# Altium PCB 256ch Headstage PCB_TY.PcbDoc (part 2 of 2)
Units mm, origin at the board's own origin, x right, y up, seen from the top; angles counter-clockwise.
Board outline 24.93 x 25 mm, 4 copper layers (Top Layer, Signal Layer 1, Signal Layer 2, Bottom Layer), stack 0.778 mm thick; 20 components, 288 nets, 788 pads, 303 vias.
Unrouted connection lines stored in the file: 4.
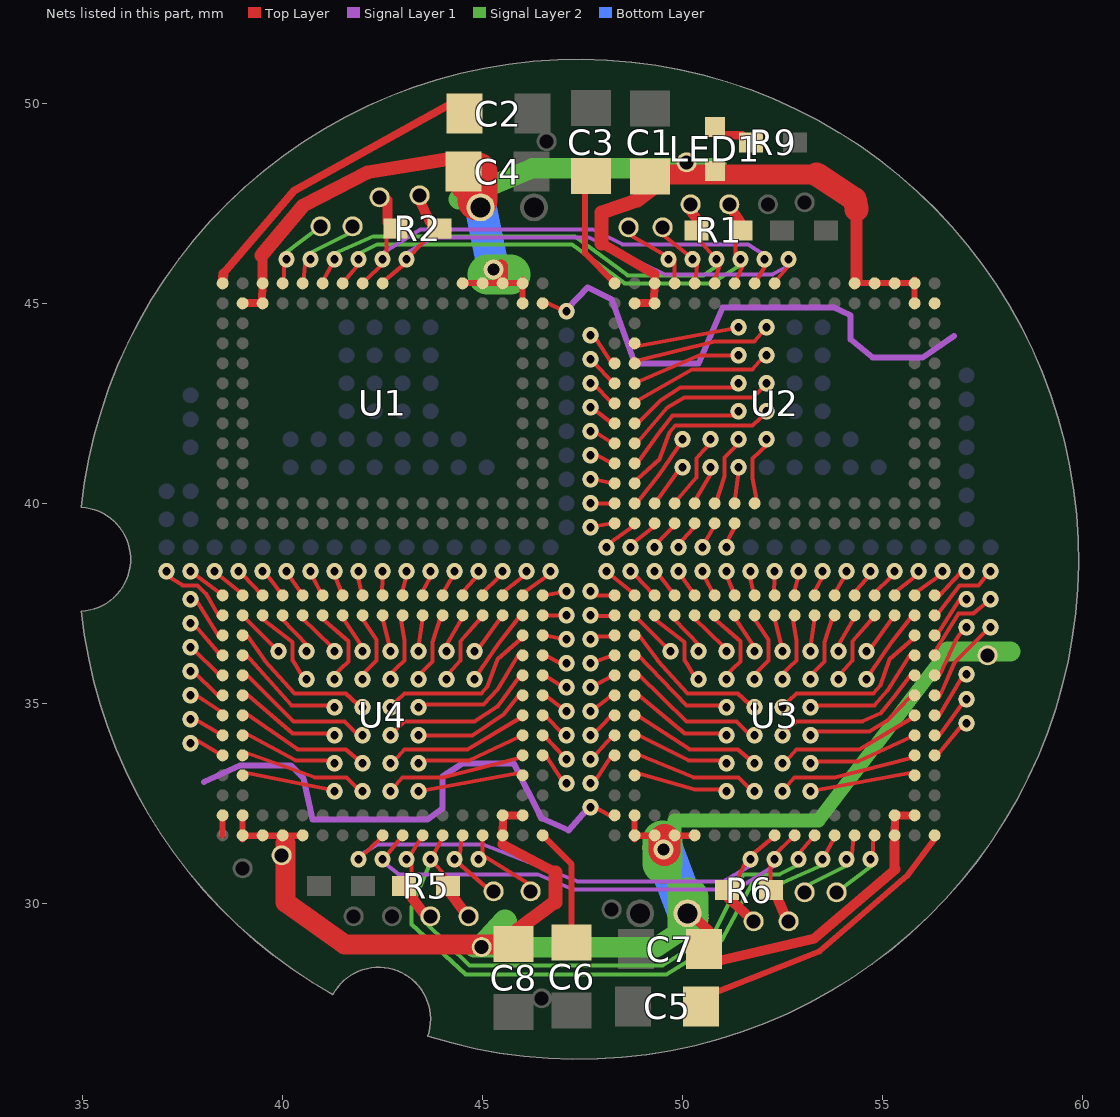
[diagram p4: the nets of this part, all layers, seen from the top]

## Via types
v1: diameter 0.406, hole 0.203, Top Layer to Bottom Layer, 291 vias
v2: diameter 0.5, hole 0.3, Top Layer to Bottom Layer, 12 vias

## Nets (pads, with @x,y where several pads share a name; then routed paths per layer and width w, separated by ;. In a path a pad name is that pad's centre, name@x,y a point inside that pad or via, vN(x,y) a via of type N, cw(c..) or ccw(c..) an arc to the next point about the centre after c; other vN are vias at no path point) (continued)
IN98: pad.0@52.1,41.6 U2.B10 | length 1.6
  Top Layer w0.102: U2.B10@51.854,40.041 51.75,40.625 51.75,41.125 v1@52.125,41.475
  other v1: 52.1,41.6
IN99: pad.0@51.1,38.9 U2.A11 | length 0.6
  Top Layer w0.102: v1@51.075,38.975 U2.A11@51.334,39.468
  other v1: 51.1,38.9
IN100: pad.0@51.4,40.9 U2.B11 | length 0.8
  Top Layer w0.102: U2.B11@51.295,40.016 v1@51.4,40.775
  other v1: 51.4,40.9
IN101: pad.0@50.5,38.9 U2.A12 | length 0.6
  Top Layer w0.102: v1@50.525,38.975 U2.A12@50.826,39.493
  other v1: 50.5,38.9
IN102: pad.0@51.4,41.6 U2.B12 | length 1.7
  Top Layer w0.102: U2.B12@50.838,40.016 51.05,40.675 51.05,41.15 v1@51.4,41.5
  other v1: 51.4,41.6
IN103: pad.0@49.9,38.9 U2.A13 | length 0.7
  Top Layer w0.102: v1@49.9,38.975 U2.A13@50.369,39.493
  other v1: 49.9,38.9
IN104: pad.0@50.7,40.9 U2.B13 | length 0.9
  Top Layer w0.102: U2.B13@50.28,40.015 v1@50.725,40.775
  other v1: 50.7,40.9
IN105: pad.0@49.3,38.9 U2.A14 | length 0.6
  Top Layer w0.102: v1@49.375,39.025 U2.A14@49.813,39.46
  other v1: 49.3,38.9
IN106: pad.0@50.7,41.6 U2.B14 | length 1.8
  Top Layer w0.102: U2.B14@49.822,40.041 50.35,40.65 50.35,41.125 v1@50.728,41.548
  other v1: 50.7,41.6
IN107: pad.0@48.7,38.9 U2.A15 | length 0.7
  Top Layer w0.102: v1@48.75,39 U2.A15@49.325,39.45
  other v1: 48.7,38.9
IN108: pad.0@50,40.9 U2.B15 | length 1.1
  Top Layer w0.102: U2.B15@49.325,40.025 v1@49.95,40.9
  other v1: 50,40.9
IN109: pad.0@48.1,38.9 U2.A16 | length 0.7
  Top Layer w0.102: v1@48.2,39.025 U2.A16@48.8,39.45
  other v1: 48.1,38.9
IN110: pad.0@50,41.6 U2.B16 | length 1.9
  Top Layer w0.102: U2.B16@48.881,40.04 49.4,40.7 v1@50,41.575
  other v1: 50,41.6
IN111: pad.0@47.7,39.4 U2.A17 | length 0.5
  Top Layer w0.102: v1@47.66,39.39 U2.A17@48.198,39.498
  other v1: 47.7,39.4
IN112: pad.0@47.7,40 U2.B17 | length 0.5
  Top Layer w0.102: v1@47.8,40 U2.B17@48.3,40
  other v1: 47.7,40
IN113: pad.0@52.1,42.3 U2.C16 | length 4.2
  Top Layer w0.102: U2.C16@48.856,40.598 49.425,41.1 49.675,41.775 49.825,41.95 51.75,41.95 v1@52.15,42.325
  other v1: 52.1,42.3
IN114: pad.0@47.7,40.6 U2.C17 | length 0.5
  Top Layer w0.102: v1@47.81,40.59 U2.C17@48.273,40.498
  other v1: 47.7,40.6
IN115: pad.0@51.4,42.3 U2.D16 | length 3
  Top Layer w0.102: U2.D16@48.907,41.055 49.4,41.75 49.75,42.2 v1@51.375,42.2
  other v1: 51.4,42.3
IN116: pad.0@47.7,41.2 U2.D17 | length 0.6
  Top Layer w0.102: v1@47.785,41.24 U2.D17@48.323,40.956
  other v1: 47.7,41.2
IN117: pad.0@52.1,43 U2.E16 | length 3.8
  Top Layer w0.102: U2.E16@48.9,41.55 49.625,42.4 50.05,42.65 51.75,42.65 v1@52.125,43
  other v1: 52.1,43
IN118: pad.0@47.7,41.8 U2.E17 | length 0.6
  Top Layer w0.102: v1@47.76,41.815 U2.E17@48.273,41.489
  other v1: 47.7,41.8
IN119: pad.0@51.4,43 U2.F16 | length 2.9
  Top Layer w0.102: U2.F16@48.9,42.025 49.45,42.575 49.95,42.9 v1@51.475,42.9
  other v1: 51.4,43
IN120: pad.0@47.7,42.4 U2.F17 | length 0.6
  Top Layer w0.102: v1@47.76,42.365 U2.F17@48.273,41.973
  other v1: 47.7,42.4
IN121: pad.0@52.1,43.7 U2.G16 | length 3.6
  Top Layer w0.102: U2.G16@48.882,42.58 50.25,43.35 51.75,43.35 v1@52.075,43.725
  other v1: 52.1,43.7
IN122: pad.0@47.7,43 U2.G17 | length 0.6
  Top Layer w0.102: v1@47.785,42.965 U2.G17@48.223,42.523
  other v1: 47.7,43
IN123: pad.0@51.4,43.7 U2.H16 | length 2.6
  Top Layer w0.102: U2.H16@48.882,43.038 50.425,43.7 v1@51.375,43.7
  other v1: 51.4,43.7
IN124: pad.0@47.7,43.6 U2.H17 | length 0.7
  Top Layer w0.102: v1@47.785,43.515 U2.H17@48.248,43.023
  other v1: 47.7,43.6
IN125: pad.0@52.1,44.4 U2.J16 | length 3.5
  Top Layer w0.102: U2.J16@48.882,43.57 50.8,44.05 51.8,44.05 v1@52.125,44.425
  other v1: 52.1,44.4
IN126: pad.0@47.7,44.2 U2.J17 | length 0.8
  Top Layer w0.102: v1@47.81,44.14 U2.J17@48.223,43.498
  other v1: 47.7,44.2
IN127: pad.0@51.4,44.4 U2.K16 | length 2.5
  Top Layer w0.102: U2.K16@48.825,43.925 v1@51.275,44.375
  other v1: 51.4,44.4
IN128: pad.0@51.1,32.8 U3.K2 | length 2.1
  Top Layer w0.102: U3.K2@48.9,33.25 50.3,32.85 v1@50.95,32.85
  other v1: 51.1,32.8
IN129: pad.0@47.7,33 U3.J1 | length 0.8
  Top Layer w0.102: v1@47.775,33 U3.J1@48.226,33.705
  other v1: 47.7,33
IN130: pad.0@51.8,32.8 U3.J2 | length 3
  Top Layer w0.102: U3.J2@48.875,33.725 50.275,33.15 51.4,33.15 v1@51.675,32.875
  other v1: 51.8,32.8
IN131: pad.0@47.7,33.6 U3.H1 | length 0.8
  Top Layer w0.102: v1@47.7,33.575 U3.H1@48.226,34.162
  other v1: 47.7,33.6
IN132: pad.0@51.1,33.5 U3.H2 | length 2.2
  Top Layer w0.102: U3.H2@48.9,34.2 50.15,33.575 v1@50.975,33.575
  other v1: 51.1,33.5
IN133: pad.0@47.7,34.2 U3.G1 | length 0.7
  Top Layer w0.102: v1@47.75,34.2 U3.G1@48.201,34.67
  other v1: 47.7,34.2
IN134: pad.0@51.8,33.5 U3.G2 | length 3.1
  Top Layer w0.102: U3.G2@48.9,34.675 50.175,33.85 51.375,33.85 v1@51.675,33.6
  other v1: 51.8,33.5
IN135: pad.0@47.7,34.8 U3.F1 | length 0.5
  Top Layer w0.102: v1@47.77,34.847 U3.F1@48.201,35.178
  other v1: 47.7,34.8
IN136: pad.0@51.1,34.2 U3.F2 | length 2.5
  Top Layer w0.102: U3.F2@48.902,35.201 50.05,34.25 v1@51.025,34.25
  other v1: 51.1,34.2
IN137: pad.0@47.7,35.4 U3.E1 | length 0.5
  Top Layer w0.102: v1@47.769,35.433 U3.E1@48.251,35.685
  other v1: 47.7,35.4
IN138: pad.0@51.8,34.2 U3.E2 | length 3.4
  Top Layer w0.102: U3.E2@48.9,35.725 50.1,34.55 51.35,34.55 v1@51.65,34.25
  other v1: 51.8,34.2
IN139: pad.0@47.7,36 U3.D1 | length 0.5
  Top Layer w0.102: v1@47.745,36.016 U3.D1@48.251,36.194
  other v1: 47.7,36
IN140: pad.0@51.1,34.9 U3.D2 | length 2.6
  Top Layer w0.102: U3.D2@48.877,36.226 50.1,34.95 v1@50.975,34.95
  other v1: 51.1,34.9
IN141: pad.0@47.7,36.6 U3.C1 | length 0.5
  Top Layer w0.102: v1@47.744,36.674 U3.C1@48.251,36.677
  other v1: 47.7,36.6
IN142: pad.0@51.8,34.9 U3.C2 | length 3.5
  Top Layer w0.102: U3.C2@48.925,36.675 49.375,36.075 50.125,35.25 51.375,35.25 v1@51.675,34.975
  other v1: 51.8,34.9
IN143: pad.0@47.7,37.2 U3.B1 | length 0.5
  Top Layer w0.102: v1@47.719,37.183 U3.B1@48.225,37.185
  other v1: 47.7,37.2
IN144: pad.0@47.7,37.8 U3.A1 | length 0.5
  Top Layer w0.102: v1@47.8,37.7 U3.A1@48.3,37.7
  other v1: 47.7,37.8
IN145: pad.0@49.7,36.3 U3.B2 | length 1
  Top Layer w0.102: U3.B2@48.877,37.126 v1@49.6,36.4
  other v1: 49.7,36.3
IN146: pad.0@48.1,38.3 U3.A2 | length 0.8
  Top Layer w0.102: v1@48.175,38.225 U3.A2@48.8,37.725
  other v1: 48.1,38.3
IN147: pad.0@50.4,35.6 U3.B3 | length 1.8
  Top Layer w0.102: U3.B3@49.3,37.1 50.05,36.525 50.05,36.075 v1@50.275,35.7
  other v1: 50.4,35.6
IN148: pad.0@48.7,38.3 U3.A3 | length 0.7
  Top Layer w0.102: v1@48.825,38.2 U3.A3@49.275,37.725
  other v1: 48.7,38.3
IN149: pad.0@50.4,36.3 U3.B4 | length 1
  Top Layer w0.102: U3.B4@49.777,37.126 v1@50.45,36.425
  other v1: 50.4,36.3
IN150: pad.0@49.3,38.3 U3.A4 | length 0.8
  Top Layer w0.102: v1@49.3,38.35 U3.A4@49.775,37.725
  other v1: 49.3,38.3
IN151: pad.0@51.1,36.3 U3.B5 | length 1
  Top Layer w0.102: U3.B5@50.3,37.125 v1@51.025,36.425
  other v1: 51.1,36.3
IN152: pad.0@49.9,38.3 U3.A5 | length 0.6
  Top Layer w0.102: v1@49.95,38.2 U3.A5@50.3,37.7
  other v1: 49.9,38.3
IN153: pad.0@51.1,35.6 U3.B6 | length 1.9
  Top Layer w0.102: U3.B6@50.777,37.126 51.45,36.55 51.45,36.05 v1@51.05,35.675
  other v1: 51.1,35.6
IN154: pad.0@50.5,38.3 U3.A6 | length 0.6
  Top Layer w0.102: v1@50.525,38.2 U3.A6@50.791,37.693
  other v1: 50.5,38.3
IN155: pad.0@51.8,36.3 U3.B7 | length 0.9
  Top Layer w0.102: U3.B7@51.298,37.134 v1@51.775,36.425
  other v1: 51.8,36.3
IN156: pad.0@51.1,38.3 U3.A7 | length 0.5
  Top Layer w0.102: v1@51.1,38.2 U3.A7@51.299,37.718
  other v1: 51.1,38.3
IN157: pad.0@51.8,35.6 U3.B8 | length 1.7
  Top Layer w0.102: U3.B8@51.781,37.135 52.15,36.575 52.15,36.075 v1@51.8,35.725
  other v1: 51.8,35.6
IN158: pad.0@51.7,38.3 U3.A8 | length 0.5
  Top Layer w0.102: v1@51.675,38.2 U3.A8@51.782,37.718
  other v1: 51.7,38.3
IN159: pad.0@52.5,36.3 U3.B9 | length 0.8
  Top Layer w0.102: U3.B9@52.288,37.185 v1@52.475,36.425
  other v1: 52.5,36.3
IN160: pad.0@52.3,38.3 U3.A9 | length 0.6
  Top Layer w0.102: U3.A9@52.289,37.668 v1@52.3,38.225
  other v1: 52.3,38.3
IN161: pad.0@52.9,38.3 U3.A10 | length 0.6
  Top Layer w0.102: U3.A10@52.758,37.683 v1@52.925,38.275
  other v1: 52.9,38.3
IN162: pad.0@52.5,35.6 U3.B10 | length 1.6
  Top Layer w0.102: v1@52.475,35.725 52.85,36.075 52.85,36.575 U3.B10@52.746,37.159
  other v1: 52.5,35.6
IN163: pad.0@53.5,38.3 U3.A11 | length 0.6
  Top Layer w0.102: U3.A11@53.266,37.732 v1@53.525,38.225
  other v1: 53.5,38.3
IN164: pad.0@53.2,36.3 U3.B11 | length 0.8
  Top Layer w0.102: v1@53.2,36.425 U3.B11@53.305,37.184
  other v1: 53.2,36.3
IN165: pad.0@54.1,38.3 U3.A12 | length 0.6
  Top Layer w0.102: U3.A12@53.774,37.707 v1@54.075,38.225
  other v1: 54.1,38.3
IN166: pad.0@53.2,35.6 U3.B12 | length 1.7
  Top Layer w0.102: v1@53.2,35.7 53.55,36.05 53.55,36.525 U3.B12@53.762,37.184
  other v1: 53.2,35.6
IN167: pad.0@54.7,38.3 U3.A13 | length 0.7
  Top Layer w0.102: U3.A13@54.231,37.707 v1@54.7,38.225
  other v1: 54.7,38.3
IN168: pad.0@53.9,36.3 U3.B13 | length 0.9
  Top Layer w0.102: v1@53.875,36.425 U3.B13@54.32,37.185
  other v1: 53.9,36.3
IN169: pad.0@55.3,38.3 U3.A14 | length 0.6
  Top Layer w0.102: U3.A14@54.787,37.74 v1@55.225,38.175
  other v1: 55.3,38.3
IN170: pad.0@53.9,35.6 U3.B14 | length 1.8
  Top Layer w0.102: v1@53.872,35.652 54.25,36.075 54.25,36.55 U3.B14@54.778,37.159
  other v1: 53.9,35.6
IN171: pad.0@55.9,38.3 U3.A15 | length 0.7
  Top Layer w0.102: U3.A15@55.275,37.75 v1@55.85,38.2
  other v1: 55.9,38.3
IN172: pad.0@54.6,36.3 U3.B15 | length 1.1
  Top Layer w0.102: v1@54.65,36.3 U3.B15@55.275,37.175
  other v1: 54.6,36.3
IN173: pad.0@56.5,38.3 U3.A16 | length 0.7
  Top Layer w0.102: U3.A16@55.8,37.75 v1@56.4,38.175
  other v1: 56.5,38.3
IN174: pad.0@54.6,35.6 U3.B16 | length 1.9
  Top Layer w0.102: v1@54.6,35.625 55.2,36.5 U3.B16@55.719,37.16
  other v1: 54.6,35.6
IN175: pad.0@57.1,38.3 U3.A17 | length 0.8
  Top Layer w0.102: U3.A17@56.402,37.677 v1@56.94,38.26
  other v1: 57.1,38.3
IN176: pad.0@57.7,38.3 U3.B17 | length 1.7
  Top Layer w0.102: U3.B17@56.35,37.2 56.925,37.95 57.4,37.95 v1@57.6,38.2
  other v1: 57.7,38.3
IN177: pad.0@52.5,34.9 U3.C16 | length 4.2
  Top Layer w0.102: v1@52.45,34.875 52.85,35.25 54.775,35.25 54.95,35.45 55.175,36.1 U3.C16@55.744,36.602
  other v1: 52.5,34.9
IN178: pad.0@57.1,37.6 U3.C17 | length 1.1
  Top Layer w0.102: U3.C17@56.352,36.702 v1@56.925,37.6
  other v1: 57.1,37.6
IN179: pad.0@53.2,34.9 U3.D16 | length 3.2
  Top Layer w0.102: v1@53.2,34.95 54.8,34.95 55.125,35.325 U3.D16@55.693,36.22
  other v1: 53.2,34.9
IN180: pad.0@57.7,37.6 U3.D17 | length 2
  Top Layer w0.102: U3.D17@56.277,36.244 56.9,37.25 57.275,37.25 v1@57.615,37.535
  other v1: 57.7,37.6
IN181: pad.0@52.5,34.2 U3.E16 | length 3.8
  Top Layer w0.102: v1@52.475,34.2 52.85,34.55 54.5,34.55 54.95,34.75 55.275,35.15 U3.E16@55.675,35.675
  other v1: 52.5,34.2
IN182: pad.0@57.1,36.9 U3.E17 | length 1.3
  Top Layer w0.102: U3.E17@56.427,35.711 56.825,36.575 v1@57.04,36.885
  other v1: 57.1,36.9
IN183: pad.0@53.2,34.2 U3.F16 | length 2.9
  Top Layer w0.102: v1@53.175,34.3 54.675,34.3 55.125,34.575 U3.F16@55.7,35.175
  other v1: 53.2,34.2
IN184: pad.0@57.7,36.9 U3.F17 | length 2
  Top Layer w0.102: U3.F17@56.427,35.177 56.8,36.025 v1@57.575,36.8
  other v1: 57.7,36.9
IN185: pad.0@52.5,33.5 U3.G16 | length 3.6
  Top Layer w0.102: v1@52.525,33.475 52.85,33.85 54.425,33.85 U3.G16@55.718,34.62
  other v1: 52.5,33.5
IN186: pad.0@57.1,35.725 U3.G17 | length 1.1
  Top Layer w0.102: U3.G17@56.402,34.677 v1@56.99,35.66
  other v1: 57.1,35.725
IN187: pad.0@53.2,33.5 U3.H16 | length 2.5
  Top Layer w0.102: v1@53.325,33.55 54.4,33.55 U3.H16@55.718,34.162
  other v1: 53.2,33.5
IN188: pad.0@57.1,35.1 U3.H17 | length 1.1
  Top Layer w0.102: U3.H17@56.402,34.177 v1@57.05,35.075
  other v1: 57.1,35.1
IN189: pad.0@52.5,32.8 U3.J16 | length 3.5
  Top Layer w0.102: v1@52.475,32.775 52.8,33.15 53.8,33.15 U3.J16@55.718,33.63
  other v1: 52.5,32.8
IN190: pad.0@57.1,34.5 U3.J17 | length 1.2
  Top Layer w0.102: U3.J17@56.302,33.627 v1@57.09,34.585
  other v1: 57.1,34.5
IN191: pad.0@53.2,32.8 U3.K16 | length 2.5
  Top Layer w0.102: v1@53.3,32.825 U3.K16@55.75,33.275
  other v1: 53.2,32.8
IN192: pad.0@41.3,32.8 U4.K2 | length 2.2
  Top Layer w0.102: U4.K2@39.05,33.275 v1@41.175,32.85
  other v1: 41.3,32.8
IN193: pad.0@37.7,34 U4.J1 | length 0.7
  Top Layer w0.102: v1@37.85,34.075 U4.J1@38.476,33.705
  other v1: 37.7,34
IN194: pad.0@42,32.8 U4.J2 | length 3
  Top Layer w0.102: U4.J2@39.05,33.775 40.8,33.15 41.6,33.15 v1@41.875,32.875
  other v1: 42,32.8
IN195: pad.0@37.7,34.6 U4.H1 | length 0.7
  Top Layer w0.102: v1@37.85,34.575 U4.H1@38.426,34.237
  other v1: 37.7,34.6
IN196: pad.0@41.3,33.5 U4.H2 | length 2.3
  Top Layer w0.102: U4.H2@39.075,34.25 40.325,33.575 v1@41.175,33.575
  other v1: 41.3,33.5
IN197: pad.0@37.7,35.2 U4.G1 | length 1
  Top Layer w0.102: v1@37.65,35.325 U4.G1@38.451,34.795
  other v1: 37.7,35.2
IN198: pad.0@42,33.5 U4.G2 | length 3.2
  Top Layer w0.102: U4.G2@39.075,34.75 40.375,33.85 41.575,33.85 v1@41.875,33.6
  other v1: 42,33.5
IN199: pad.0@37.7,35.8 U4.F1 | length 0.9
  Top Layer w0.102: v1@37.75,35.825 U4.F1@38.401,35.178
  other v1: 37.7,35.8
IN200: pad.0@41.3,34.2 U4.F2 | length 2.5
  Top Layer w0.102: U4.F2@39.077,35.251 40.25,34.25 v1@41.225,34.25
  other v1: 41.3,34.2
IN201: pad.0@37.7,36.4 U4.E1 | length 1
  Top Layer w0.102: v1@37.725,36.4 U4.E1@38.451,35.685
  other v1: 37.7,36.4
IN202: pad.0@42,34.2 U4.E2 | length 3.4
  Top Layer w0.102: U4.E2@39.1,35.725 40.275,34.55 41.55,34.55 v1@41.85,34.25
  other v1: 42,34.2
IN203: pad.0@37.7,37 U4.D1 | length 1.1
  Top Layer w0.102: v1@37.725,37.05 U4.D1@38.451,36.194
  other v1: 37.7,37
IN204: pad.0@41.3,34.9 U4.D2 | length 2.7
  Top Layer w0.102: U4.D2@39.077,36.226 40.225,34.95 v1@41.175,34.95
  other v1: 41.3,34.9
IN205: pad.0@37.7,37.6 U4.C1 | length 1.1
  Top Layer w0.102: v1@37.844,37.574 U4.C1@38.401,36.677
  other v1: 37.7,37.6
IN206: pad.0@42,34.9 U4.C2 | length 3.5
  Top Layer w0.102: U4.C2@39.125,36.675 39.55,36.075 40.3,35.25 41.575,35.25 v1@41.875,34.975
  other v1: 42,34.9
IN207: pad.0@37.1,38.3 U4.B1 | length 1.8
  Top Layer w0.102: v1@37.119,38.183 37.5,37.95 37.875,37.95 38.075,37.75 U4.B1@38.4,37.185
  other v1: 37.1,38.3
IN208: pad.0@37.7,38.3 U4.A1 | length 1.1
  Top Layer w0.102: v1@37.619,38.368 U4.A1@38.5,37.7
  other v1: 37.7,38.3
IN209: pad.0@39.9,36.3 U4.B2 | length 1
  Top Layer w0.102: U4.B2@39.077,37.126 v1@39.8,36.4
  other v1: 39.9,36.3
IN210: pad.0@38.3,38.3 U4.A2 | length 0.8
  Top Layer w0.102: v1@38.375,38.225 U4.A2@39,37.725
  other v1: 38.3,38.3
IN211: pad.0@40.6,35.6 U4.B3 | length 1.8
  Top Layer w0.102: U4.B3@39.5,37.1 40.25,36.525 40.25,36.075 v1@40.475,35.7
  other v1: 40.6,35.6
IN212: pad.0@38.9,38.3 U4.A3 | length 0.7
  Top Layer w0.102: v1@39.025,38.2 U4.A3@39.475,37.725
  other v1: 38.9,38.3
IN213: pad.0@40.6,36.3 U4.B4 | length 1
  Top Layer w0.102: U4.B4@39.977,37.126 v1@40.65,36.425
  other v1: 40.6,36.3
IN214: pad.0@39.5,38.3 U4.A4 | length 0.8
  Top Layer w0.102: v1@39.5,38.35 U4.A4@39.975,37.725
  other v1: 39.5,38.3
IN215: pad.0@41.3,36.3 U4.B5 | length 1
  Top Layer w0.102: U4.B5@40.5,37.125 v1@41.225,36.425
  other v1: 41.3,36.3
IN216: pad.0@40.1,38.3 U4.A5 | length 0.6
  Top Layer w0.102: v1@40.15,38.2 U4.A5@40.5,37.7
  other v1: 40.1,38.3
IN217: pad.0@41.3,35.6 U4.B6 | length 1.9
  Top Layer w0.102: U4.B6@40.977,37.126 41.65,36.55 41.65,36.05 v1@41.25,35.675
  other v1: 41.3,35.6
IN218: pad.0@40.7,38.3 U4.A6 | length 0.6
  Top Layer w0.102: v1@40.725,38.2 U4.A6@40.991,37.693
  other v1: 40.7,38.3
IN219: pad.0@42,36.3 U4.B7 | length 0.9
  Top Layer w0.102: U4.B7@41.498,37.134 v1@41.975,36.425
  other v1: 42,36.3
IN220: pad.0@41.3,38.3 U4.A7 | length 0.5
  Top Layer w0.102: v1@41.3,38.2 U4.A7@41.499,37.718
  other v1: 41.3,38.3
IN221: pad.0@42,35.6 U4.B8 | length 1.7
  Top Layer w0.102: U4.B8@41.981,37.135 42.35,36.575 42.35,36.075 v1@42,35.725
  other v1: 42,35.6
IN222: pad.0@41.9,38.3 U4.A8 | length 0.5
  Top Layer w0.102: v1@41.875,38.2 U4.A8@41.982,37.718
  other v1: 41.9,38.3
IN223: pad.0@42.7,36.3 U4.B9 | length 0.8
  Top Layer w0.102: U4.B9@42.488,37.185 v1@42.675,36.425
  other v1: 42.7,36.3
IN224: pad.0@42.5,38.3 U4.A9 | length 0.6
  Top Layer w0.102: U4.A9@42.489,37.668 v1@42.5,38.225
  other v1: 42.5,38.3
IN225: pad.0@43.1,38.3 U4.A10 | length 0.6
  Top Layer w0.102: U4.A10@42.958,37.683 v1@43.125,38.275
  other v1: 43.1,38.3
IN226: pad.0@42.7,35.6 U4.B10 | length 1.6
  Top Layer w0.102: v1@42.675,35.725 43.05,36.075 43.05,36.575 U4.B10@42.946,37.159
  other v1: 42.7,35.6
IN227: pad.0@43.7,38.3 U4.A11 | length 0.6
  Top Layer w0.102: U4.A11@43.466,37.732 v1@43.725,38.225
  other v1: 43.7,38.3
IN228: pad.0@43.4,36.3 U4.B11 | length 0.8
  Top Layer w0.102: v1@43.4,36.425 U4.B11@43.505,37.184
  other v1: 43.4,36.3
IN229: pad.0@44.3,38.3 U4.A12 | length 0.6
  Top Layer w0.102: U4.A12@43.974,37.707 v1@44.275,38.225
  other v1: 44.3,38.3
IN230: pad.0@43.4,35.6 U4.B12 | length 1.7
  Top Layer w0.102: v1@43.4,35.7 43.75,36.05 43.75,36.525 U4.B12@43.962,37.184
  other v1: 43.4,35.6
IN231: pad.0@44.9,38.3 U4.A13 | length 0.7
  Top Layer w0.102: U4.A13@44.431,37.707 v1@44.9,38.225
  other v1: 44.9,38.3
IN232: pad.0@44.1,36.3 U4.B13 | length 0.9
  Top Layer w0.102: v1@44.075,36.425 U4.B13@44.52,37.185
  other v1: 44.1,36.3
IN233: pad.0@45.5,38.3 U4.A14 | length 0.6
  Top Layer w0.102: U4.A14@44.987,37.74 v1@45.425,38.175
  other v1: 45.5,38.3
IN234: pad.0@44.1,35.6 U4.B14 | length 1.8
  Top Layer w0.102: v1@44.072,35.652 44.45,36.075 44.45,36.55 U4.B14@44.978,37.159
  other v1: 44.1,35.6
IN235: pad.0@46.1,38.3 U4.A15 | length 0.7
  Top Layer w0.102: U4.A15@45.475,37.75 v1@46.05,38.2
  other v1: 46.1,38.3
IN236: pad.0@44.8,36.3 U4.B15 | length 1.1
  Top Layer w0.102: v1@44.85,36.3 U4.B15@45.475,37.175
  other v1: 44.8,36.3
IN237: pad.0@46.7,38.3 U4.A16 | length 0.7
  Top Layer w0.102: U4.A16@46,37.75 v1@46.6,38.175
  other v1: 46.7,38.3
IN238: pad.0@44.8,35.6 U4.B16 | length 1.9
  Top Layer w0.102: v1@44.8,35.625 45.4,36.5 U4.B16@45.919,37.16
  other v1: 44.8,35.6
IN239: pad.0@47.1,37.8 U4.A17 | length 0.5
  Top Layer w0.102: U4.A17@46.602,37.702 v1@47.14,37.81
  other v1: 47.1,37.8
IN240: pad.0@47.1,37.2 U4.B17 | length 0.5
  Top Layer w0.102: U4.B17@46.5,37.2 v1@47,37.2
  other v1: 47.1,37.2
IN241: pad.0@42.7,34.9 U4.C16 | length 4.2
  Top Layer w0.102: v1@42.65,34.875 43.05,35.25 44.975,35.25 45.125,35.425 45.375,36.1 U4.C16@45.944,36.602
  other v1: 42.7,34.9
IN242: pad.0@47.1,36.6 U4.C17 | length 0.5
  Top Layer w0.102: U4.C17@46.527,36.702 v1@46.99,36.61
  other v1: 47.1,36.6
IN243: pad.0@43.4,34.9 U4.D16 | length 3.1
  Top Layer w0.102: v1@43.45,34.975 45.025,34.975 45.375,35.35 U4.D16@45.918,36.245
  other v1: 43.4,34.9
IN244: pad.0@47.1,36 U4.D17 | length 0.6
  Top Layer w0.102: U4.D17@46.477,36.244 v1@47.015,35.96
  other v1: 47.1,36
IN245: pad.0@42.7,34.2 U4.E16 | length 3.9
  Top Layer w0.102: v1@42.675,34.2 43.05,34.55 44.8,34.55 45.375,34.925 U4.E16@45.925,35.675
  other v1: 42.7,34.2
IN246: pad.0@47.1,35.4 U4.E17 | length 0.6
  Top Layer w0.102: U4.E17@46.527,35.711 v1@47.04,35.385
  other v1: 47.1,35.4
IN247: pad.0@43.4,34.2 U4.F16 | length 2.9
  Top Layer w0.102: v1(43.4,34.2) 44.75,34.2 45.525,34.725 U4.F16@45.925,35.225
IN248: pad.0@47.1,34.8 U4.F17 | length 0.6
  Top Layer w0.102: U4.F17@46.527,35.227 v1@47.04,34.835
  other v1: 47.1,34.8
IN249: pad.0@42.7,33.5 U4.G16 | length 3.6
  Top Layer w0.102: v1@42.725,33.475 43.05,33.85 44.625,33.85 U4.G16@45.918,34.62
  other v1: 42.7,33.5
IN250: pad.0@47.1,34.2 U4.G17 | length 0.6
  Top Layer w0.102: U4.G17@46.577,34.677 v1@47.015,34.235
  other v1: 47.1,34.2
IN251: pad.0@43.4,33.5 U4.H16 | length 2.6
  Top Layer w0.102: v1@43.45,33.575 44.675,33.575 U4.H16@45.918,34.162
  other v1: 43.4,33.5
IN252: pad.0@47.1,33.6 U4.H17 | length 0.7
  Top Layer w0.102: U4.H17@46.552,34.177 v1@47.015,33.685
  other v1: 47.1,33.6
IN253: pad.0@42.7,32.8 U4.J16 | length 3.5
  Top Layer w0.102: v1@42.675,32.775 43,33.15 44,33.15 U4.J16@45.918,33.63
  other v1: 42.7,32.8
IN254: pad.0@47.1,33 U4.J17 | length 0.8
  Top Layer w0.102: U4.J17@46.577,33.702 v1@46.99,33.06
  other v1: 47.1,33
IN255: pad.0@43.4,32.8 U4.K16 | length 2.5
  Top Layer w0.102: v1@43.525,32.825 U4.K16@45.975,33.275
  other v1: 43.4,32.8
MISO1+: pad.0@40.1,46.1 pad.6@40.95,46.925 U1.N14 | length 1.8
  Top Layer w0.102: U1.N14@40.025,45.5 v1@40.05,46.1
  Signal Layer 2 w0.102: pad.0@40.025,46.225 pad.6@40.95,46.925
  other v1: 40.1,46.1
MISO1-: pad.0@40.7,46.1 pad.6@41.75,46.925 U1.N13 | length 1.8
  Top Layer w0.102: U1.N13@40.525,45.55 v1@40.575,46.1
  Signal Layer 2 w0.102: pad.0@40.625,46.225 pad.6@41.775,46.8
  other v1: 40.7,46.1
MISO2+: pad.0@49.65,46.1 pad.6@48.65,46.9 U2.N14 | length 1.9
  Top Layer w0.102: pad.6@48.65,46.725 v1@49.775,46.075 ; U2.N14@49.8,45.5 v1@49.8,46.1
  other v1: 49.65,46.1
MISO2-: pad.0@50.25,46.1 pad.6@49.5,46.9 U2.N13 | length 1.5
  Top Layer w0.102: pad.6@49.45,46.75 v1@50.175,46.175 ; U2.N13@50.325,45.55 v1@50.375,46.1
  other v1: 50.25,46.1
MISO3+: pad.0@54.7,31.1 pad.6@53.85,30.275 U3.N14 | length 1.8
  Top Layer w0.102: v1@54.75,31.1 U3.N14@54.775,31.7
  Signal Layer 2 w0.102: pad.6@53.85,30.275 pad.0@54.775,30.975
  other v1: 54.7,31.1
MISO3-: pad.0@54.1,31.1 pad.6@53.05,30.275 U3.N13 | length 1.8
  Top Layer w0.102: v1@54.225,31.1 U3.N13@54.275,31.65
  Signal Layer 2 w0.102: pad.6@53.025,30.4 pad.0@54.175,30.975
  other v1: 54.1,31.1
MISO4+: pad.0@44.9,31.1 pad.6@46.2,30.3 U4.N14 | length 1.9
  Top Layer w0.102: v1@45,31.1 U4.N14@45,31.7 ; v1@45,31.2 pad.6@46.125,30.5
  other v1: 44.9,31.1
MISO4-: pad.0@44.3,31.1 pad.6@45.275,30.3 U4.N13 | length 1.6
  Top Layer w0.102: v1@44.375,31.025 pad.6@45.15,30.35 ; v1@44.425,31.1 U4.N13@44.475,31.65
  other v1: 44.3,31.1
MOSI3+: pad.0@43.7,31.1 pad.0@53.5,31.1 pad.6@44.65,29.675 R5.2 U3.N12 U4.N12 | length 16.3
  Top Layer w0.102: v1@43.725,31.125 U4.N12@44.025,31.7 ; v1@43.8,31 R5.2@44.275,30.45 ; v1@53.525,31.15 U3.N12@53.8,31.65
  Top Layer w0.254: R5.2@44.175,30.275 pad.6@44.525,29.8
  Signal Layer 2 w0.102: pad.0@43.7,31.025 43.225,29.9 43.225,29.475 44.575,28.225 49.6,28.225 50.975,29.075 51.75,30.525 52.525,30.525 pad.0@53.6,31
  other v1: 43.7,31.1 53.5,31.1
MOSI3-: pad.0@43.1,31.1 pad.0@43.692,29.675 pad.0@52.9,31.1 pad.6@43.692,29.675 R5.1 U3.N11 U4.N11 | length 13.6
  Top Layer w0.102: v1@43.125,31.1 U4.N11@43.487,31.682 ; R5.1@43.225,30.5 v1@43.225,31.1 ; v1@52.875,31.2 U3.N11@53.287,31.682
  Top Layer w0.254: R5.1@43.15,30.25 pad.6@43.5,29.775
  Signal Layer 2 w0.102: pad.6@43.575,29.525 44.675,28.45 49.5,28.45 50.775,29.25 51.525,30.725 52.425,30.725 pad.0@53.025,31.025
  other v1: 43.1,31.1 52.9,31.1
MOSI+: pad.0@41.3,46.1 pad.0@50.85,46.1 pad.6@50.2,47.475 R1.2 U1.N12 U2.N12 | length 12.7
  Top Layer w0.102: U1.N12@41,45.55 v1@41.275,46.05 ; R1.2@50.275,46.75 v1@50.75,46.2 ; U2.N12@50.775,45.5 v1@50.975,46.075
  Top Layer w0.254: pad.6@50.15,47.375 R1.2@50.5,46.9
  Signal Layer 2 w0.102: pad.0@41.2,46.2 42.275,46.675 47.3,46.675 48.625,45.7 50.525,45.7 pad.0@50.875,45.95
  other v1: 41.3,46.1 50.85,46.1
MOSI-: pad.0@41.9,46.1 pad.0@51.45,46.1 pad.6@51.167,47.475 R1.1 U1.N11 U2.N11 | length 12.7
  Top Layer w0.102: U1.N11@41.513,45.518 v1@41.925,46 ; U2.N11@51.313,45.518 v1@51.575,46.1 ; v1@51.325,46.1 R1.1@51.325,46.7
  Top Layer w0.254: pad.6@51.225,47.35 R1.1@51.55,46.875
  Signal Layer 2 w0.102: pad.0@41.775,46.175 42.375,46.475 47.225,46.475 48.55,45.5 50.725,45.5 pad.0@51.475,45.975
  other v1: 41.9,46.1 51.45,46.1
NetC2_1: C2.1 U1.N17 | length 7.4
  Top Layer w0.2: 38.525,45.75 40.3,47.825 C2.1@44.199,49.982
  Top Layer w0.25: U1.N17@38.499,45.532 38.525,45.75
NetC3_1: C3.1 U2.N17 | length 3
  Top Layer w0.152: C3.1@47.562,48.194 47.564,46.25 U2.N17@48.3,45.5
NetC5_1: C5.1 U3.N17 | length 7
  Top Layer w0.152: C5.1@50.751,27.743 53.425,28.8 55.625,30.7 U3.N17@56.351,31.668
NetC6_1: C6.1 U4.N17 | length 2.7
  Top Layer w0.152: U4.N17@46.5,31.7 47.225,30.975 C6.1@47.225,29.3
NetLED1_2: LED1.2 R9.2 | length 0.6
  Top Layer w0.203: LED1.2@50.9,49.2 R9.2@51.5,49.2
REF: pad.0@37.9,32.9 pad.0@47.1,44.8 pad.0@47.7,32.4 pad.0@56.85,44.25 U1.M1 U2.M1 U3.M1 U4.M1 | length 27.3
  Top Layer w0.102: U1.M1@46.599,45.02 v1@47.032,44.806 ; v1@47.803,32.407 U3.M1@48.201,32.18
  Top Layer w0.152: 38.5,31.7 U4.M1@38.5,32.2
  Signal Layer 1 w0.15: pad.0@38.04,33.037 38.95,33.45 40.2,33.45 40.525,33.125 40.75,32.1 43.625,32.1 44,32.375 44,33.175 44.5,33.5 45.775,33.5 46.475,32.125 47.15,31.825 pad.0@47.675,32.425 ; pad.0@47.125,44.875 47.625,45.4 48.225,45.1 48.8,43.5 50.4,43.5 51,44.9 53.775,44.9 54.2,44.7 54.2,44.1 54.75,43.65 56,43.65 pad.0@56.785,44.188
  other v1: 47.7,32.4 47.1,44.8
SCLK3+: pad.0@42.5,31.1 pad.0@52.3,31.1 pad.6@52.65,29.55 R6.2 U3.N10 U4.N10 | length 12.8
  Top Layer w0.102: v1@42.5,31.075 U4.N10@42.978,31.67 ; R6.2@52.2,30.5 v1@52.2,31.1 ; v1@52.25,31.175 U3.N10@52.778,31.67
  Top Layer w0.254: R6.2@52.35,30.175 pad.6@52.55,29.7
  Signal Layer 1 w0.102: pad.0@42.55,31 42.9,30.725 46.375,30.725 47.25,30.35 51.35,30.35 pad.0@52.425,31.025
  other v1: 42.5,31.1 52.3,31.1
SCLK3-: pad.0@41.9,31.1 pad.0@51.7,31.1 pad.6@51.775,29.55 R6.1 U3.N9 U4.N9 | length 13.1
  Top Layer w0.102: v1@41.925,31.125 U4.N9@42.5,31.675 ; R6.1@51.275,30.4 v1@51.575,31.05 ; v1@51.725,31.2 U3.N9@52.3,31.675
  Top Layer w0.254: R6.1@51.125,30.15 pad.6@51.675,29.65
  Signal Layer 1 w0.102: pad.0@41.975,31.225 42.375,31.475 45,31.475 47.375,30.55 51.025,30.55 pad.0@51.75,30.975
  other v1: 41.9,31.1 51.7,31.1
SCLK+: pad.0@42.5,46.1 pad.0@52.05,46.1 pad.6@42.425,47.65 R2.2 U1.N10 U2.N10 | length 12.6
  Top Layer w0.102: U1.N10@42.022,45.53 v1@42.55,46.025 ; v1@42.6,46.1 R2.2@42.6,46.7 ; U2.N10@51.822,45.53 v1@52.175,46.125
  Top Layer w0.254: R2.2@42.625,47.025 pad.6@42.625,47.575
  Signal Layer 1 w0.102: pad.0@42.375,46.175 43.45,46.85 47.75,46.85 48.5,46.475 51.625,46.475 pad.0@52.05,46.2
  other v1: 42.5,46.1 52.05,46.1
SCLK-: pad.0@43.1,46.1 pad.0@52.65,46.1 pad.6@43.425,47.7 R2.1 U1.N9 U2.N9 | length 13
  Top Layer w0.102: U1.N9@42.5,45.525 v1@43.075,46 ; v1@43.15,46.15 R2.1@43.775,46.8 ; U2.N9@52.3,45.525 v1@52.775,46.075
  Top Layer w0.254: pad.6@43.425,47.575 R2.1@43.675,47.05
  Signal Layer 1 w0.102: pad.0@43.05,46.225 43.775,46.65 47.65,46.65 49.55,45.725 52.25,45.725 pad.0@52.725,45.975
  other v1: 43.1,46.1 52.65,46.1
VDD3: C1.2 C4.2 C7.2 C8.2 LED1.1 pad.0@44.978,28.906 pad.0@45.275,45.85 pad.0@49.525,31.35 pad.0@57.625,36.2 pad.6@39.975,31.2 pad.6@44.95,47.4 pad.6@44.978,28.906 pad.6@50.1,48.525 pad.6@50.125,29.75 pad.6@57.625,36.2 U1.M2 U1.M15 U1.M16 U1.N2 U1.N3 U1.N4 U1.N5 U1.N15 U2.M2 U2.M15 U2.M16 U2.N2 U2.N3 U2.N4 U2.N5 U2.N15 U3.M2 U3.M15 U3.M16 U3.N2 U3.N3 U3.N4 U3.N5 U3.N15 U4.M2 U4.M15 U4.M16 U4.N2 U4.N3 U4.N4 U4.N5 U4.N15 | length 81.3
  Top Layer w0.152: U4.N2@38.945,31.688 U4.N2@39,31.688 ; U4.N2@39,31.6 U4.N2@39,31.688 ; U4.M2@39,32.15 U4.N2@39,31.688 ; U4.N5@40.393,31.688 40,31.688 U4.N2@39,31.688 ; U1.N5@44.607,45.512 U1.N2@46,45.512 ; U1.M2@46,45.05 U1.N2@46,45.512 ; U1.N2@46,45.6 U1.N2@46,45.512 ; U1.N2@46.055,45.512 U1.N2@46,45.512 ; U3.N2@48.745,31.688 U3.N2@48.8,31.688 ; U3.N2@48.8,31.6 U3.N2@48.8,31.688 ; U3.M2@48.8,32.15 U3.N2@48.8,31.688 ; U3.N5@50.193,31.688 U3.N2@48.8,31.688 ; U2.N5@54.407,45.512 U2.N2@55.8,45.512 ; U2.M2@55.8,45.05 U2.N2@55.8,45.512 ; U2.N2@55.8,45.6 U2.N2@55.8,45.512 ; U2.N2@55.855,45.512 U2.N2@55.8,45.512
  Top Layer w0.203: U1.M16@38.99,45.007 U1.M15@39.524,45.007 ; U1.M15@39.488,45.027 39.498,45.5 U1.N15@39.5,45.6 ; U4.M15@45.476,32.193 U4.M16@46.01,32.193 ; 45.5,31.475 45.504,31.7 U4.M15@45.512,32.173 ; U2.M16@48.79,45.007 U2.M15@49.324,45.007 ; U2.M15@49.288,45.027 49.296,45.5 49.3,45.725 ; U3.M15@55.276,32.193 55.3,32.193 U3.M16@55.81,32.193 ; 55.3,31.525 55.303,31.7 U3.M15@55.312,32.173
  Top Layer w0.254: U1.N15@39.5,45.6 39.5,46.175 ; 45.5,31.475 46.825,30.775 ; 47.975,46.5 49.3,45.725 ; pad.6@50.1,29.825 50.151,29.779 C7.2@50.65,29.325 ; C7.2@50.695,28.515 53.3,29.125 55.325,30.85 ; 55.3,30.85 55.3,31.525
  Top Layer w0.3: 54.35,47.35 U2.N5@54.351,45.612
  Top Layer w0.35: 39.475,46.2 40.525,47.45 42.125,48.275 C4.2@44.155,48.61 ; C8.2@45.375,28.975 45.636,29.169 46.825,30.05 ; U1.N3@45.458,45.639 v2@45.458,45.919 ; 46.825,30.025 46.825,30.775 ; 47.975,46.5 47.975,47.275 ; 48,47.275 48.875,47.575 49.354,47.941 49.725,48.225
  Top Layer w0.5: 40.074,31.513 40.074,31.2 40.075,30.05 ; 40.075,30.025 41.55,28.975 C8.2@45.375,28.975 ; C4.2@44.475,47.875 44.972,47.425 pad.6@45,47.4 ; 49.725,48.225 53.35,48.225
  Top Layer w0.6: 53.35,48.225 54.298,47.602 54.35,47.35
  Top Layer w0.8: v2@49.542,31.331 v2@49.542,31.586
  Top Layer w1: pad.6@44.875,47.564 C4.2@44.875,48.269
  Signal Layer 2 w0.35: 49.8,29.333 49.8,31.35 49.8,32.075 53.4,32.075 56.625,36.3
  Signal Layer 2 w0.5: 56.625,36.3 57.625,36.299 58.2,36.298
  Signal Layer 2 w0.508: 44.4,47.6 44.797,47.766 46.25,48.375 50.1,48.375 50.875,48.375 ; pad.6@44.791,28.898 44.978,28.898 49.325,28.9 50.274,29.522 pad.6@50.391,29.598
  Signal Layer 2 w0.6: pad.6@45.007,28.945 45.557,29.545
  Signal Layer 2 w1: v2@45.116,45.724 45.691,45.724 ; 49.5,31 v2@49.5,31.575 ; pad.6@50.15,29.75 50.15,30.15
  Bottom Layer w0.8: pad.6@44.95,47.425 44.955,47.401 45.265,45.848 v2@45.275,45.8
  Bottom Layer w1: v2@49.5,31.4 49.52,31.348 50.122,29.749 pad.6@50.15,29.675
  other v2: 49.525,31.35 45.275,45.85
pads on no net: U1.N16 U2.N16 U3.N16 U4.N16
copper on no net: | length 4.5
  Top Layer w0.254: 37.9,32.762 37.9,33.175 ; 38.462,32.2 38.5,32.2 38.5,32.7 ; 46.5,44.557 46.5,45 46.5,45.5 ; 48.3,31.7 48.3,32.2 48.3,32.696 ; 56.3,44.504 56.3,45
  Signal Layer 1 w0.254: 38.037,33.037 37.9,32.9 38.475,32.325 38.475,32.25

## Polygon pours and split planes (outlines as drawn)
GND on Bottom Layer "Bottom Layer-No Net" (solid, remove dead copper, pour order 8): 34.9,51.5 60,51.5 60,26 34.9,26
VDD3 on Signal Layer 2 "Bottom Layer-No Net" (solid, remove dead copper, pour order 12): 35,51.5 60,51.5 60,26 35,26
GND on Top Layer "Bottom Layer-No Net" (solid, remove dead copper, pour order 10): 35,51.5 60,51.5 60,26 35,26
GND on Signal Layer 1 "Bottom Layer-No Net" (solid, remove dead copper, pour order 6): 35,51.5 60,51.5 60,26.5 59.5,26 35,26

## Keep-outs
Keep-Out Layer:
  lines w0.1: 34.967,39.897 cw(c47.4,38.6) 43.631,26.682 ccw(c42.4,27.1) 41.255,27.715 cw(c47.4,38.6) 34.968,37.301 ccw(c34.9,38.6) 34.968,39.898

## Silkscreen, mask and mechanical layers (free items; w line width, h text height)
Top Overlay:
  text "U1" at 38.61,44.61 h0.66
  text "Copyright @ 2026" at 35.9,40.15 h0.7 r69.3
  text "256Ch" at 59.25,36.5 h1.02 r90
  text "TY Bai" at 52.125,27.3 h0.88 r34.11
Bottom Overlay:
  text "Ball up / on this side" at 53.1,47 h0.88
  text "Copyright @ 2026" at 37.65,44.75 h0.7 r69.3
  text "256Ch" at 59.325,40.625 h1.02 r90
  text "TY Bai" at 50.875,27.7 h1.2